# Altium PCB Board.PcbDoc (part 2 of 2)
Units mil, origin at the board's own origin, x right, y up, seen from the top; angles counter-clockwise.
Board outline 6771.85 x 2362.21 mil, 2 copper layers (Top Layer, Bottom Layer), stack 61.8 mil thick; 72 components, 55 nets, 275 pads, 91 vias.
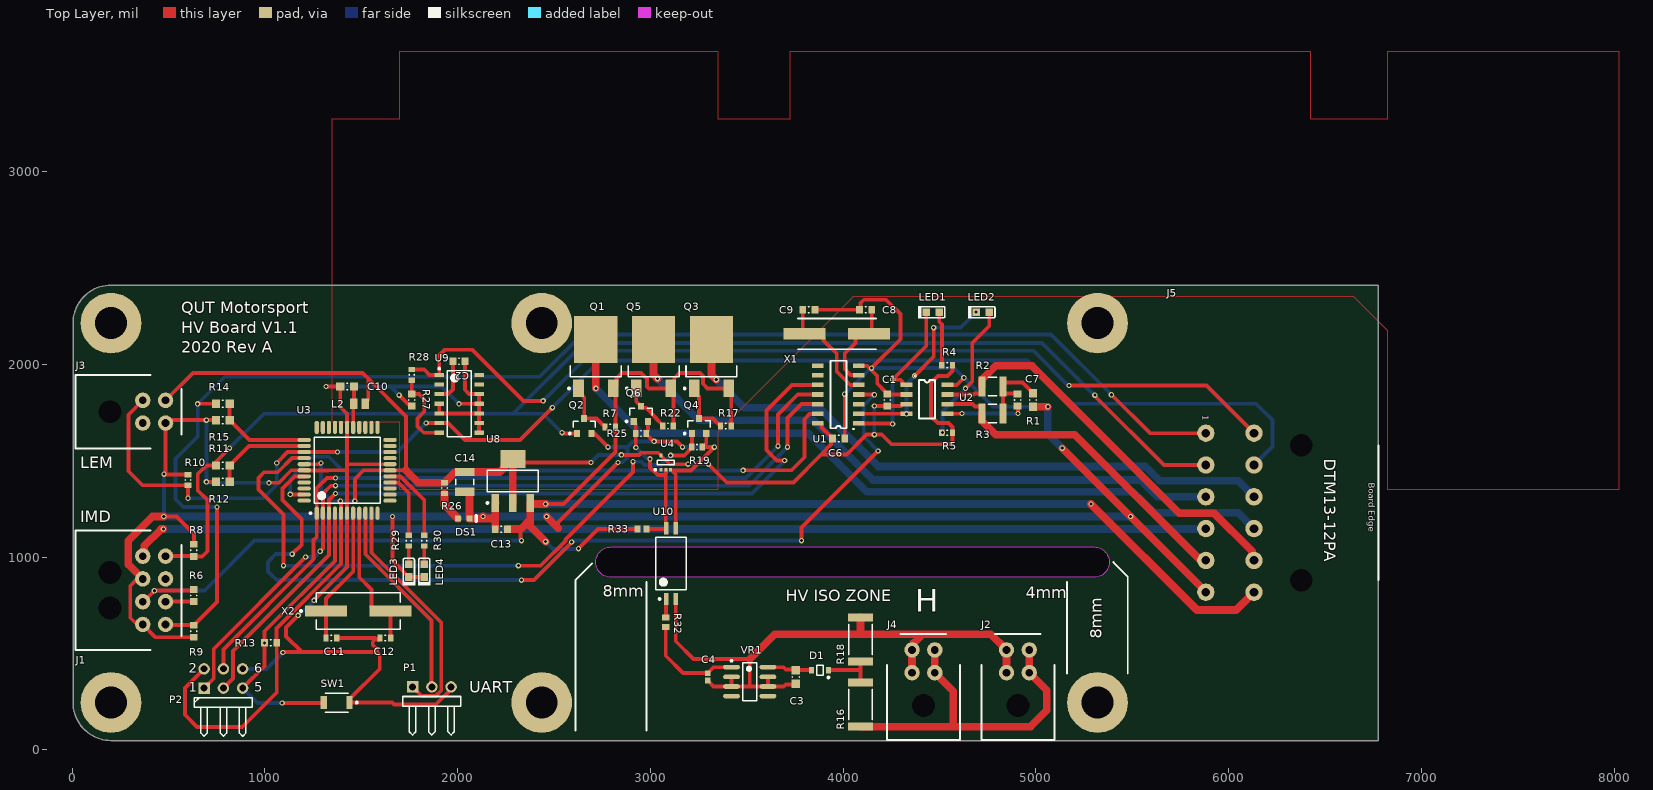
[diagram p0: Top Layer view]

## Via types
v1: diameter 27.56, hole 15.75, Top Layer to Bottom Layer, 91 vias

## Nets (pads, with @x,y where several pads share a name; then routed paths per layer and width w, separated by ;. In a path a pad name is that pad's centre, name@x,y a point inside that pad or via, vN(x,y) a via of type N, cw(c..) or ccw(c..) an arc to the next point about the centre after c; other vN are vias at no path point) (continued)
NetJ5_7: (continued)
  Bottom Layer w20: v1(2443.74,1810) 2703.74,2070 4986.85,2070 5166.85,1890 v1(5171.85,1890)
NetJ5_9: J5.9 Q3.2 | length 3260.6
  Top Layer w40: Q3.2 3316.85,1945 v1(3341.85,1920)
  Bottom Layer w40: v1(3341.85,1920) 3486.85,1775 3876.85,1775 4181.85,1470 5566.85,1470 5641.85,1395 6049.35,1395 J5.9
NetJ5_10: J5.10 Q1.2 | length 3969.9
  Top Layer w40: v1(2716.85,1875) Q1.2
  Bottom Layer w40: v1(2716.85,1875) 2950.07,1641.78 3819.31,1641.78 4122.27,1338.82 5503.03,1338.82 5611.85,1230 6049.35,1230 J5.10
NetLED3_1: LED3.1 R29.2 | length 94
  Top Layer w20: LED3.1 R29.2
NetLED4_1: LED4.1 R30.2 | length 94
  Top Layer w20: LED4.1 R30.2
NetQ1_1: Q1.1 Q2.3 R7.1 | length 296.6
  Top Layer w20: Q1.1 2627.09,1857.74 2644.59,1840.24 2645.13,1840.24 2656.85,1828.52 Q2.3 2719.92,1719.37 2756.57,1682.72 2760.51,1682.72 2764.29,1678.94 R7.1
NetQ6_1: Q6.1 R25.2 R33.1 U4.2 U10.6 | length 794.5
  Top Layer w20: Q6.1 2913.82,1701.77 2924.29,1691.3 R25.2 2924.29,1568.93 v1(2925,1568.22) ; R33.1 3079.8,1145 3080,1145.2 3080,1435.02 ; v1(2998.08,1509.17) 2998.44,1508.81 2998.44,1465.39 3039.08,1424.76 3069.74,1424.76 3080,1435.02 ; U4.2 3080,1435.02 ; 3080.28,1438.27 3080.28,1435.3 3080,1435.02
  Bottom Layer w20: v1(2925,1568.22) 2982.6,1510.62 2996.63,1510.62 v1(2998.08,1509.17)
NetR11_1: R11.1 R12.2 U3.35 | length 514
  Top Layer w20: R12.2 R11.1 918.27,1575.98 U3.35
NetR14_1: R14.1 R15.2 U3.34 | length 514.6
  Top Layer w20: R14.1 R15.2 919.8,1607.48 U3.34
NetR27_1: R27.1 R28.1 U9.7 | length 430.7
  Top Layer w20: R28.1 R27.1 1800.35,1846.5 1826.85,1820 1826.85,1754.37 1791.85,1719.37 1791.85,1677.5 1824.35,1645 U9.7
NetR32_2: R32.2 U10.1 | length 96.4
  Top Layer w20: R32.2 3080.81,687.94 3080.81,782.11 U10.1
PWR_ONLED: DS1.1 R26.1 | length 159.2
  Top Layer w40: R26.1 1931.85,1270.47 DS1.1
UART_RX: P1.2 U3.9 | length 1049.9
  Top Layer w20: U3.9 1521.34,1014.24 1865,670.57 P1.2@1865,320
UART_TX: P1.1 U3.10 | length 1250
  Top Layer w20: U3.10 1552.83,1022.34 1915,660.17 1915,307.9 1886.06,278.97 1813.91,278.97 P1.1
pads on no net: J1.7 J1.NC J2.NC J3.NC J4.NC J5.NC U1.3 U3.11 U3.12 U3.13 U3.14 U3.19 U3.20 U3.21 U3.22 U3.23 U3.24 U3.25 U3.26 U3.29 U3.30 U3.31 U3.32 U3.33 U3.41 U3.42 U3.44 U4.1 U9.2 U9.3 U9.12 U9.13 U9.14 VR1.4 VR1.5

## Polygon pours and split planes (outlines as drawn)
+5 on Top Layer "Top Layer-+5" (solid, shelved, pour order 0): 1700,3275 1700,3625 3350,3625 3350,3275 3725,3275 3725,3625 6424.01,3625 6424.01,3275.99 6425,3275 6825,3275 6825,3625 8025,3625 8025,1350 6825,1350 6825,2175.19 6650.19,2350 4050,2350 4050,2347.97 3350,1647.97 3350,1350 1700,1350 1700,1700 1350,1700 1350,3275
GND on Bottom Layer "Bottom Layer-GND" (solid, shelved, pour order 2): 1700,3275 1700,3625 3350,3625 3350,3275 3725,3275 3725,3625 6424.01,3625 6424.01,3275.99 6425,3275 6825,3275 6825,3625 8025,3625 8025,1350 6825,1350 6825,2175.19 6650.19,2350 4050,2350 4050,2347.97 3350,1647.97 3350,1350 1700,1350 1700,1700 1350,1700 1350,3275

## Silkscreen, mask and mechanical layers (free items; w line width, h text height)
Top Overlay:
  lines w10: 2611.85,100 2611.85,880.98 2696.85,965.98 ; 2980,100 2980,870 ; 5161.85,395 5161.85,870 ; 5401.85,973.74 5476.85,898.74 5476.85,395
  text "QUT Motorsport" at 566.85,2265 h60
  text "HV Board V1.1" at 566.85,2160 h60
  text "2020 Rev A" at 566.85,2060 h60
  text "LEM" at 41.85,1460 h60
  text "IMD" at 41.85,1180 h60
  text "8mm" at 2751.85,795 h60
  text "4mm" at 4946.85,785 h60
  text "HV ISO ZONE" at 3701.85,770 h60
  text "H" at 4374.07,676.71 h200
  text "8mm" at 5341.85,575 h60 r90
  text "UART" at 2061.38,296.5 h60
Mechanical 1:
  text "Board Cutout / Slot (4mm)" at 2801.85,945 h60
BoardOutline:
  lines w10: 2716.85,48.15 201.85,48.15 ; 6776.85,2410.35 201.85,2410.35 ccw(c201.85,2213.5) 5,2213.5 5,245 ccw(c201.85,245) 201.85,48.15 ; 201.85,48.15 201.85,48.15 ; 2795.59,895 cw(c2795.59,973.74) 2795.59,1052.48 5301.85,1052.48 cw(c5301.85,973.74) 5301.85,895 2795.59,895

## Text inside footprints (layer, text, board x,y; h text height)
J5: Top Overlay "1" at 5866.85,1735 h32 r270; Top Overlay "DTM13-12PA" at 6496.85,1510 h60 r270; Top Overlay "Board Edge" at 6726.85,1385 h32 r270
P2: Top Overlay "2" at 605,400 h50; Top Overlay "1" at 605,300 h50; Top Overlay "5" at 945,300 h50; Top Overlay "6" at 945,400 h50